# Altium PCB IridiumPhone_r2.PcbDoc
Units mil, origin at the board's own origin, x right, y up, seen from the top; angles counter-clockwise.
Board outline 3661.42 x 1574.8 mil, 6 copper layers (Top Layer, InternalPlane1, MidLayer1, MidLayer2, InternalPlane2, Bottom Layer), stack 70.611 mil thick; 52 components, 55 nets, 243 pads, 153 vias.
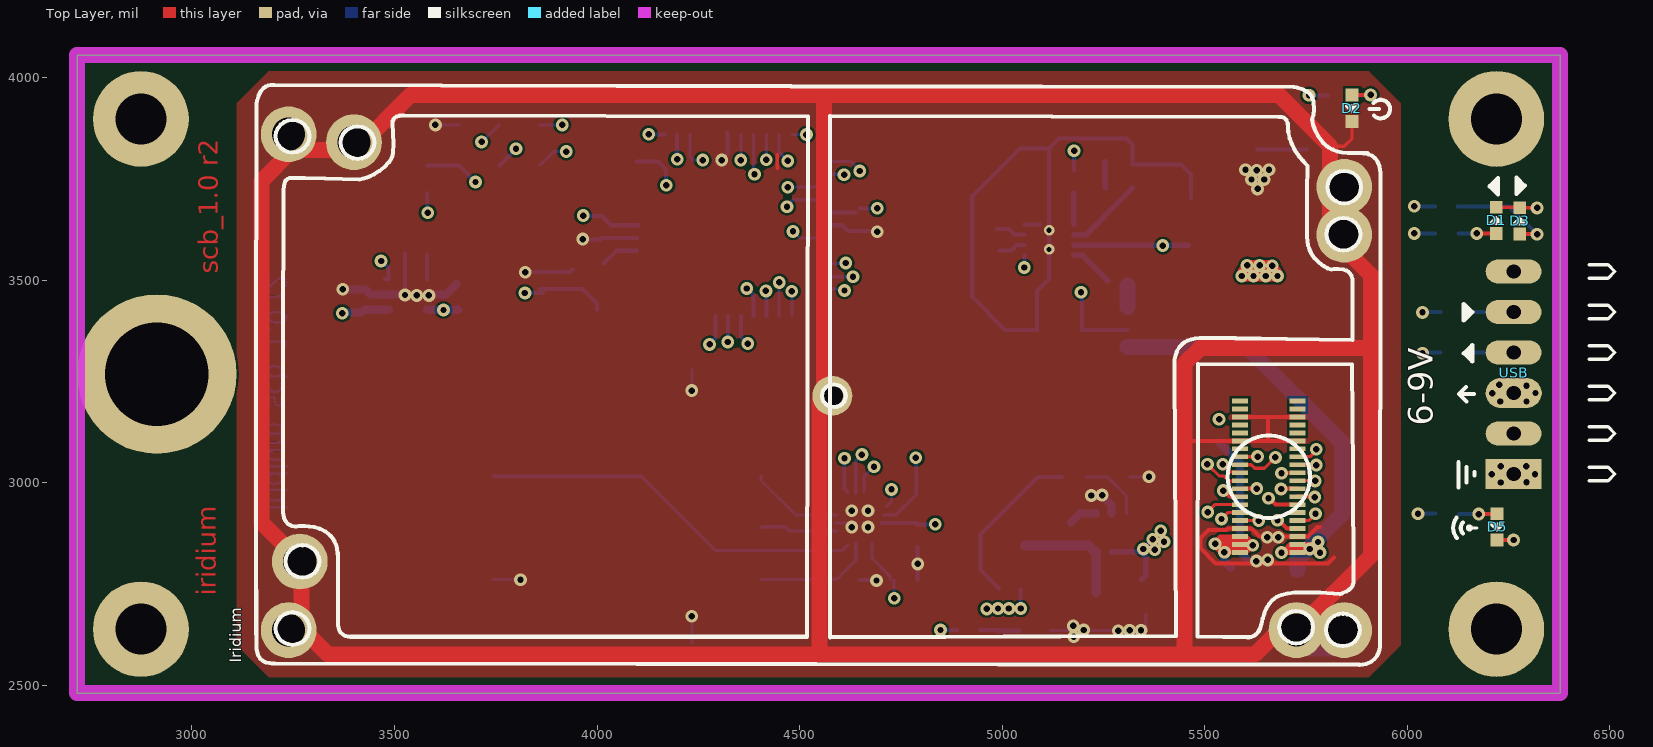
[diagram p0: Top Layer view]
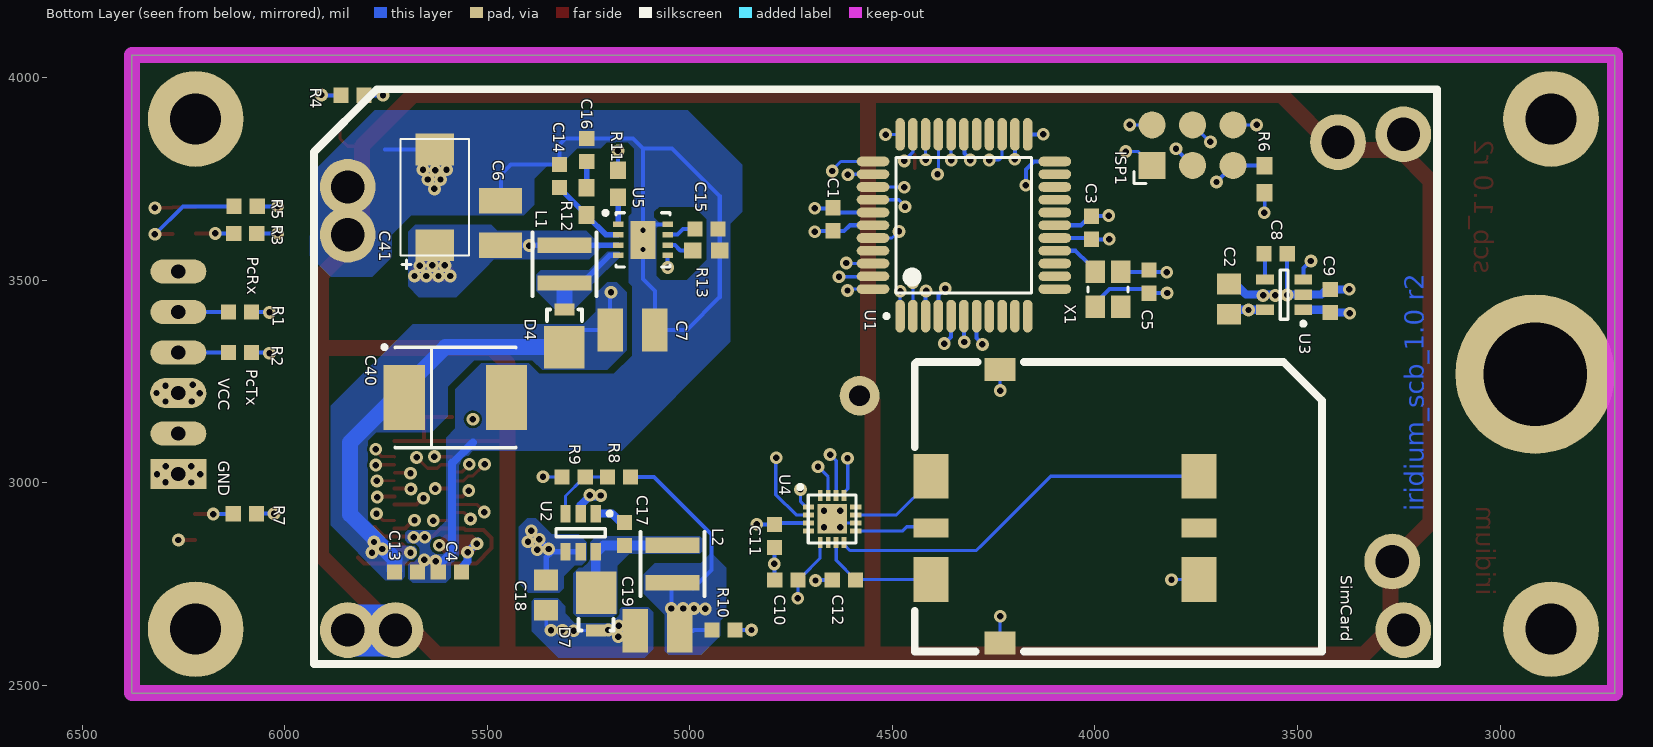
[diagram p1: Bottom Layer view, seen from below]
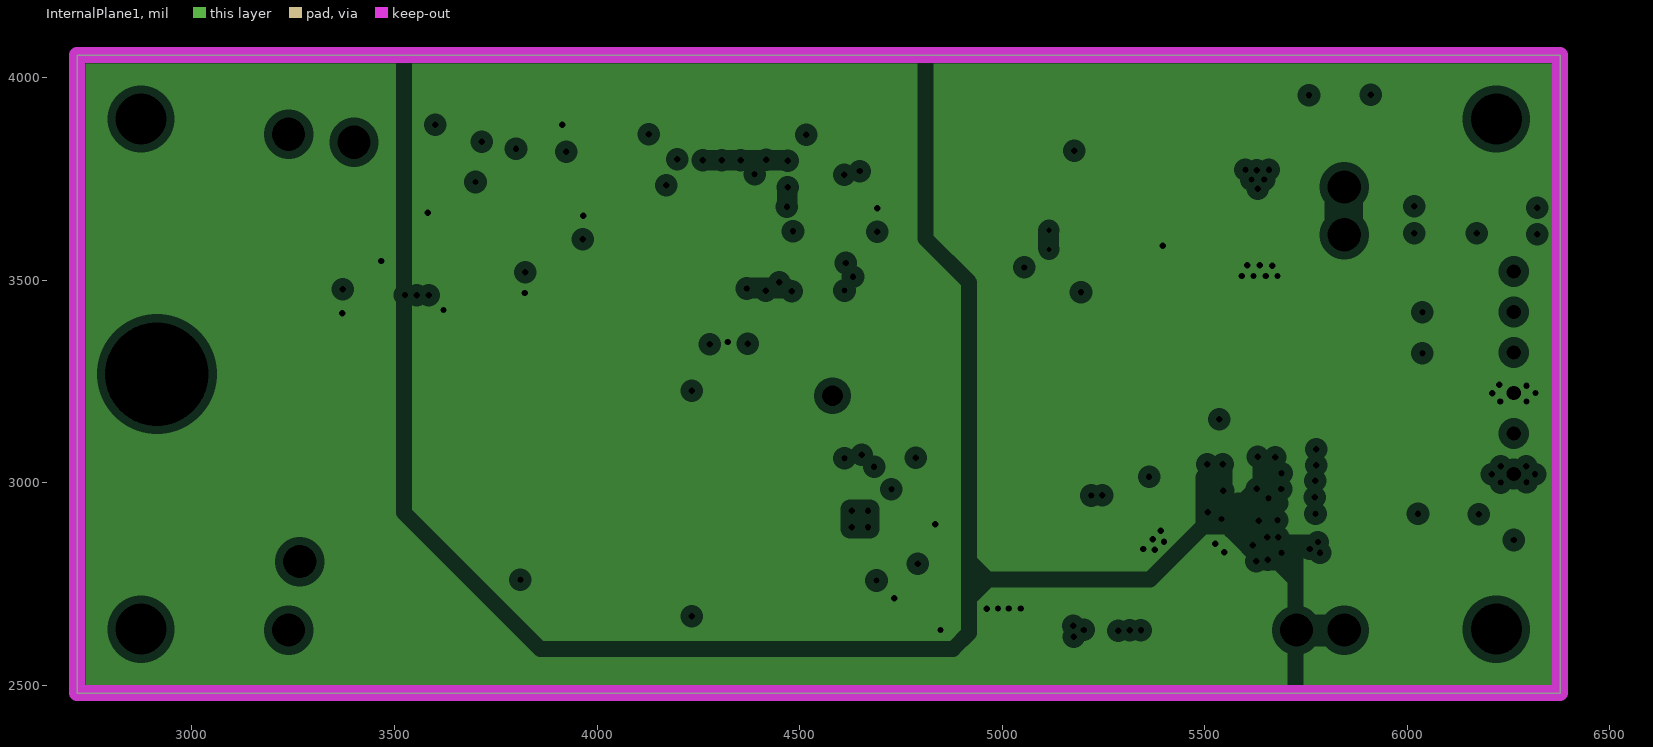
[diagram p2: InternalPlane1, clearances drawn from the general rule]
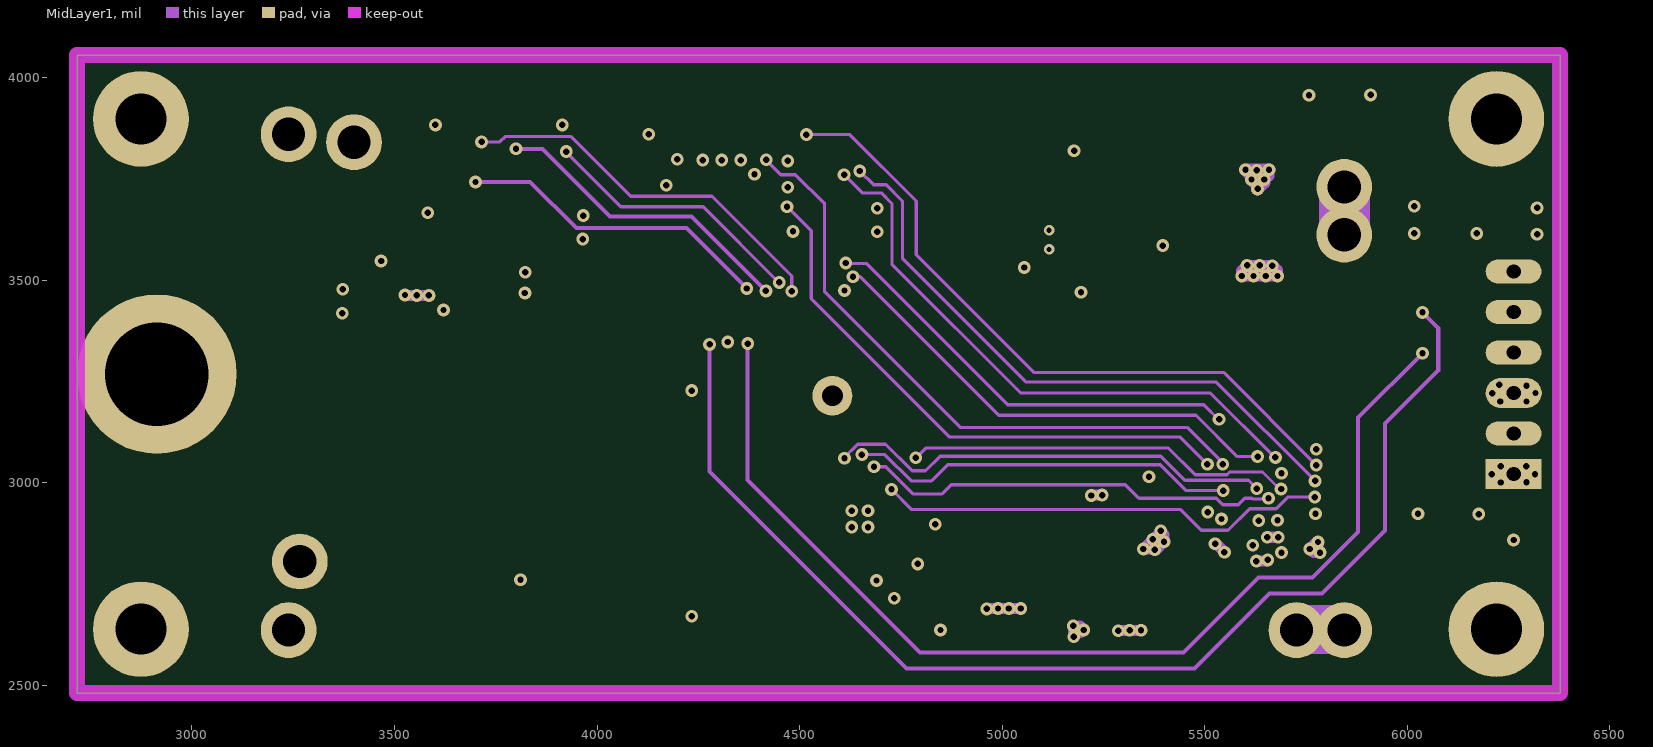
[diagram p3: MidLayer1]
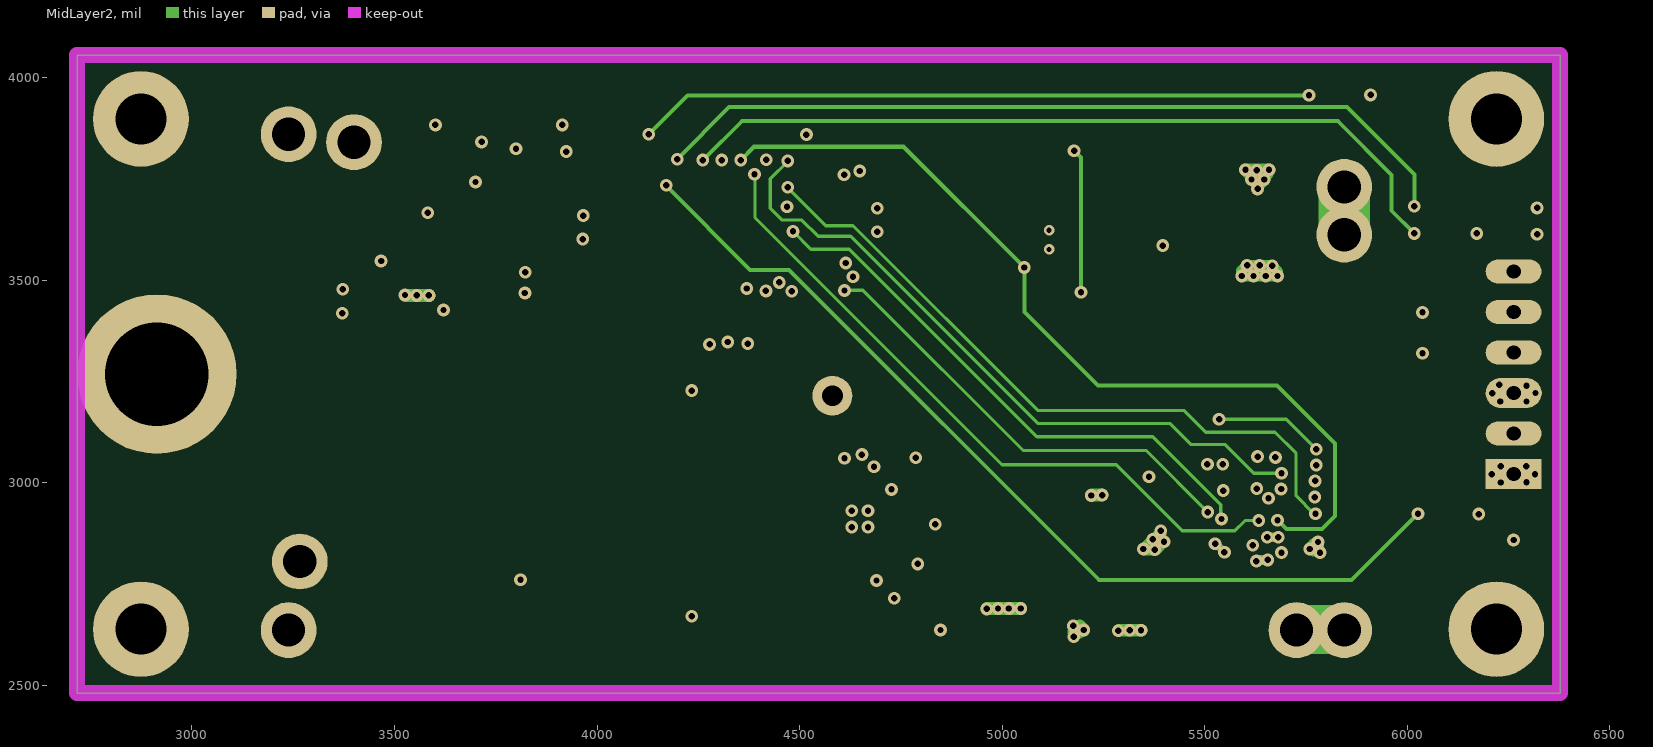
[diagram p4: MidLayer2]
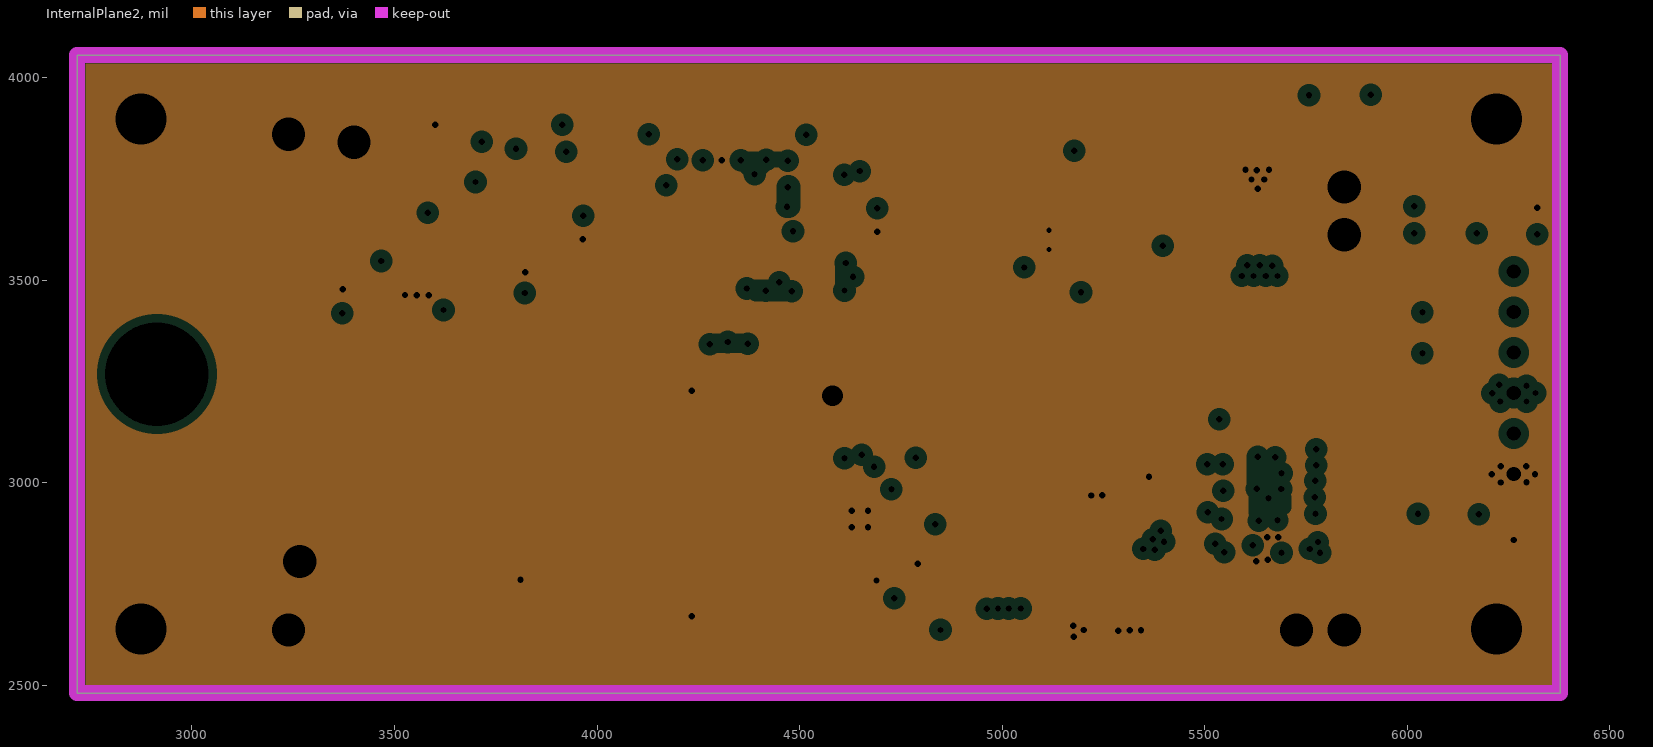
[diagram p5: InternalPlane2, clearances drawn from the general rule]

## Layer stack, top to bottom
Top Layer: signal copper 1.4
Dielectric: core 11.811, FR-4, Dk 4.8
InternalPlane1: plane copper 1.4, net (Multiple Nets)
Dielectric: prepreg 12.6, FR-4, Dk 4.8
MidLayer1: signal copper 1.4
Dielectric: core 12.6, FR-4, Dk 4.8
MidLayer2: signal copper 1.4
Dielectric: prepreg 12.6, FR-4, Dk 4.8
InternalPlane2: plane copper 1.4, net GND
Dielectric: core 12.6, FR-4, Dk 4.8
Bottom Layer: signal copper 1.4

## Board outline
2716.54,2480.32 6377.95,2480.32 6377.95,4055.12 2716.54,4055.12

## Design rules (kind name [scope] priority, off if disabled: settings)
Clearance [All] p1: gap=5.91
HoleSize [All] p1: absolutevalues=TRUE maxlimit=393.7 minlimit=1 maxpercent=80.000 minpercent=20.000
MinimumSolderMaskSliver [All] p1 off: minsoldermaskwidth=10
PlaneClearance [All] p1: clearance=20
PlaneConnect PlaneConnect_1 [IsVia] p1: planeconnectstyle=Direct reliefexpansion=20 reliefentries=4 reliefconductorwidth=10 reliefairgap=10
PlaneConnect [All] p2: planeconnectstyle=Direct reliefexpansion=20 reliefentries=4 reliefconductorwidth=10 reliefairgap=10
PolygonConnect PolygonConnect_2 [(InComponentClass('Bottom Side Components'))   or (InComponentClass('Top Side Components'))] p1: connectstyle=Direct reliefconductorwidth=10 reliefentries=4 polygonreliefangle="90 Angle"
PolygonConnect PolygonConnect_1 [IsVia] p2: connectstyle=Direct reliefconductorwidth=10 reliefentries=4 polygonreliefangle="90 Angle"
PolygonConnect [All] p3: connectstyle=Relief reliefconductorwidth=10 reliefentries=4 polygonreliefangle="90 Angle"
RoutingVias [All] p1: holewidth=28 width=50 viastyle="Through Hole" minholewidth=7.87 minwidth=23.62 maxholewidth=28 maxwidth=78.74
SilkToSilkClearance [All] p1 off: silktosilkclearance=10
SilkscreenOverComponentPads [All] p1 off: minsilkscreentomaskgap=10
SolderMaskExpansion SolderMaskExpansion_1 [IsVia] p1: expansion=-39.37
SolderMaskExpansion [All] p2: expansion=4
TestPointUsage [All] p1: valid=0 allowmultiple=FALSE
Testpoint [All] p1: side=15 testpointundercomponent=TRUE minsize=40 maxsize=100 preferedsize=60 minholesize=0 maxholesize=40 preferedholesize=32 testpointgrid=1 style=1023 order=0-112345678
Width [All] p1: maxlimit=39.37 minlimit=5.91 preferedwidth=10 toplayer_prefwidth=7.87 midlayer1_minwidth=7.87 midlayer1_prefwidth=7.87 midlayer2_minwidth=7.87 midlayer2_prefwidth=7.87 bottomlayer_prefwidth=7.87 minimp=50.000000 maximp=50.000000 favimp=50.000000
18 further rules are at their usual default settings.

## Classes and differential pairs
component class IridiumPhoneCarrier: C1 C2 C3 C4 C5 C8 C9 C13 C17 C18 C19 C41 D1 D2 D3 D5 D7 Iridium ISP1 L2 R1 R2 R3 R4 R5 R6 R7 R8 R9 R10 U1 U2 U3 USB X1
component class Designator: C6 C7 C14 C15 C16 C40 D4 L1 R11 R12 R13 U5

## Components (designator, comment, footprint, x,y, rotation, side; value= is the part's Value field where it differs from the comment)
C1 "100nF" V0603 4647,3650 r90 bottom
C2 "TAJR475K006RNJ" V0805 3669,3453 r90 bottom
C3 "0603" V0603 4009,3629 r90 bottom
C4 "0603" V0603 5593,2779 r180 bottom
C5 "0603" V0603 3867,3496 r270 bottom
C6 "1210" 1210 5468,3641 r270 bottom
C7 "1210" 1210 5142,3377 r0 bottom
C8 "Cap" V0603 3554,3565 r180 bottom
C9 "Cap" V0603 3419,3448 r270 bottom
C10 "100nF" V0603 4762,2759 r180 bottom
C11 "100nF" V0603 4791,2868 r90 bottom
C12 "100nF" V0603 4620,2759 r180 bottom
C13 "0603" V0603 5701,2779 r0 bottom
C14 "47pF" V0603 5322,3757 r270 bottom
C15 "100nF" V0603 4959,3626 r0 bottom
C16 "2.2nF" V0603 5255,3821 r270 bottom
C17 "Cap" V0603 5162,2873 r270 bottom
C18 "Cap" V0805 5355,2722 r90 bottom
C19 "Cap" 1210 5080,2634 r180 bottom
C40 "47uF/35V/0.3R/10%/CaseE" E 5579,3210 r180 bottom
C41 "470uF/6V" T491D 5630,3704 r90 bottom
D1 "D11" KP-1608SURC_R 6220.11,3647 r90 top
D2 "D11" KP-1608SURC_R 5864,3924 r270 top
D3 "D11" KP-1608SURC_R 6278,3646 r90 top
D4 "UPS140" DO-216AA 5310,3427 r90 bottom
D5 "D11" KP-1608SURC_R 6222.11,2890.37 r270 top
D7 "B230A 30 V, 2 A, DO-214AC, 0,5V" DO-216AA 5232,2635 r270 bottom
Iridium "IR9523 - MOLEX  53885-0408  Stacking Board Connector" IRIDIUMPHONE 5845,3730 r270 top locked
ISP1 "" ISP 3859,3783 r180 bottom
L1 "XFL4020-472MEC" XFL4020 5310,3539 r90 bottom
L2 "XFL4020-472MEC" XFL4020 5043,2799 r90 bottom
R1 "R12" V0603RES 6111,3421 r180 bottom
R2 "R12" V0603RES 6111,3321 r180 bottom
R3 "R12" V0603RES 6098,3615 r0 bottom
R4 "R12" V0603RES 5833,3956 r0 bottom
R5 "R12" V0603RES 6097,3682 r0 bottom
R6 "0603" 0603RES 3581,3749 r270 bottom
R7 "R12" V0603RES 6099,2923 r0 bottom
R8 "R12" V0603RES 5175,3014 r0 bottom
R9 "R12" V0603RES 5287,3014 r0 bottom
R10 "" V0603RES 4917,2636 r180 bottom
R11 "0603" 0603RES 5178,3738 r270 bottom
R12 "0603" 0603RES 5255,3694 r90 bottom
R13 "0603" 0603RES 4960,3573 r180 bottom
SimCard "MOLEX  47388-2001  CONNECTOR, SIM CARD, 1.9MM HEIGHT" simcard 4405,2888 r180 bottom
U1 "ATmega162-16AC" 44A_M 4323.72,3635.18 r90 bottom
U2 "ADP2300" SOT-23-OT6_N 5270,2876 r270 bottom
U3 "LP2992AIM5-3.3" MF05A_N 3533,3464 r0 bottom
U4 "NCN4555" QFN16_3MM 4649,2910 r180 bottom
U5 "LT3580" DFN-MF8 5116,3599 r180 bottom
USB "Header 6H" HDR1X6H 6263,3021 r90 top
X1 "Xtal Osc" CRY_2_5x3_2 3968,3477 r90 bottom

## Footprints (in the part's own frame and the unit in brackets; to place one, negate y for a bottom-side part, rotate by r counter-clockwise, add the part's x,y. Pads: shape width x height; smd on the part's side, far side on the other; paste and mask are expansions set on the pad)
44A_M [mm] "Thin QFP, 44-Leads, Body 10x10mm, Pitch 0.8mm, IPC Low Density"
  oval 2.05x0.6 smd: 1(-5.7,4) 2(-5.7,3.2) 3(-5.7,2.4) 4(-5.7,1.6) 5(-5.7,0.8) 6(-5.7,0) 7(-5.7,-0.8) 8(-5.7,-1.6) 9(-5.7,-2.4) 10(-5.7,-3.2) 11(-5.7,-4) 23(5.7,-4) 24(5.7,-3.2) 25(5.7,-2.4) 26(5.7,-1.6) 27(5.7,-0.8) 28(5.7,0) 29(5.7,0.8) 30(5.7,1.6) 31(5.7,2.4) 32(5.7,3.2) 33(5.7,4)
  oval 0.6x2.05 smd: 12(-4,-5.7) 13(-3.2,-5.7) 14(-2.4,-5.7) 15(-1.6,-5.7) 16(-0.8,-5.7) 17(0,-5.7) 18(0.8,-5.7) 19(1.6,-5.7) 20(2.4,-5.7) 21(3.2,-5.7) 22(4,-5.7) 34(4,5.7) 35(3.2,5.7) 36(2.4,5.7) 37(1.6,5.7) 38(0.8,5.7) 39(0,5.7) 40(-0.8,5.7) 41(-1.6,5.7) 42(-2.4,5.7) 43(-3.2,5.7) 44(-4,5.7)
  silkscreen extent -5.82,-4.25 4.25,4.98, body extent -5,-5 5,5, height 1.2
0603RES [mm] "Chip Capacitor; Body 1.6 x 0.8 mm (LxW typ)"
  rect 1.1x1 smd: 1(-0.85,0) 2(0.85,0)
  body extent -1.12,-0.46 1.02,0.46, height 0.4
1210 [mm] "Chip Capacitor; Body 3.2 x 2.5 mm (LxW typ)"
  rect 1.6x2.7 smd: 1(-1.4,0) 2(1.4,0)
  body extent -1.82,-1.24 1.82,1.22, height 1.4
CRY_2_5x3_2 [mm]
  rect 1.4x1.2 smd: 1(-1.1,-0.8) 2(1.1,-0.8) 3(1.1,0.8) 4(-1.1,0.8)
  silkscreen extent -0.15,-1.25 0.15,1.25, body extent -1.6,-1.25 1.6,1.25, height 0.55
DFN-MF8 [mm] "SON, 8-Leads, Body 3x3mm, Pitch 0.65mm, Microchip Recommended"
  rect 0.65x0.35 smd: 1(-1.55,0.975) 2(-1.55,0.325) 3(-1.55,-0.325) 4(-1.55,-0.975) 5(1.55,-0.975) 6(1.55,-0.325) 7(1.55,0.325) 8(1.55,0.975)
  rect 1.55x2.4 smd: 9(0,0)
  silkscreen extent -2.48,-1.7 1.7,1.82, body extent -1.55,-1.55 1.55,1.55, height 1
DO-216AA [mil] "DO-216AA; 2 Leads; Body 2.7 x 1.6 mm, (LxW)"
  rect 30x50 smd: 1(0,0)
  rect 105x100 smd: 2(-92.5,0)
  silkscreen extent -28,-43 0,43, body extent -138,-43 4,43, height 59
E [mm] "Capacitor, SM Tantalum; Body 7.3 x 6.0 mm (LxW typ)"
  rect 2.6x4.1 smd: 1(-3.2,0) 2(3.2,0)
  silkscreen extent -4.58,-3.15 3.8,3.27
HDR1X6H [mm] "Connector; Header; 6 Position; Right Angle"
  rect 1.9x3.5 hole 0.9: 1(0,0)
  oval 1.5x3.5 hole 0.9: 2(2.54,0) 4(7.62,0) 5(10.16,0) 6(12.7,0)
  oval 1.9x3.5 hole 0.9: 3(5.08,0)
  silkscreen extent -0.42,-6.35 13.12,-4.75
IRIDIUMPHONE [mm]
  rect 0.3x1 smd: 1(13.43,-2.93) 2(13.43,-6.53) 3(13.93,-2.93) 4(13.93,-6.53) 5(14.43,-2.93) 6(14.43,-6.53) 7(14.93,-2.93) 8(14.93,-6.53) 9(15.43,-2.93) 10(15.43,-6.53) 11(15.93,-2.93) 12(15.93,-6.53) 13(16.43,-2.93) 14(16.43,-6.53) 15(16.93,-2.93) 16(16.93,-6.53) 17(17.43,-2.93) 18(17.43,-6.53) 19(17.93,-2.93) 20(17.93,-6.53) 21(18.43,-2.93) 22(18.43,-6.53) 23(18.93,-2.93) 24(18.93,-6.53) 25(19.43,-2.93) 26(19.43,-6.53) 27(19.93,-2.93) 28(19.93,-6.53) 29(20.43,-2.93) 30(20.43,-6.53) 31(20.93,-2.93) 32(20.93,-6.53) 33(21.43,-2.93) 34(21.43,-6.53) 35(21.93,-2.93) 36(21.93,-6.53) 37(22.43,-2.93) 38(22.43,-6.53) 39(22.93,-2.93) 40(22.93,-6.53)
  round 3.5 hole 2.08: GND(-3.3,-66.2) GND(-2.8,-62.1) GND(0,0) GND(3,0) GND(23.5,-65.5) GND(27.8,-3) GND(27.8,0) GND(27.8,-66.2)
  round 2.5 hole 1.3: GND(13.1,-32.1)
  silkscreen extent -6.39,-68.25 29.97,2.27, body extent -6.1,-68.33 30,2.26, height 14.6
ISP [mm] "In Circuit Programming Connector"
  rect 1.7x1.7 smd: 1(0,0)
  round 1.7 smd: 2(0,2.54) 3(2.54,0) 4(2.54,2.54) 5(5.08,0) 6(5.08,2.54)
  silkscreen extent -1.14,-1.14 -0.38,-0.38
KP-1608SURC_R [mm]
  rect 0.8x0.8 smd: 1(-0.825,0) 2(0.825,0)
  silkscreen extent -0.15,-0.3 0.15,0.3, body extent -0.81,-0.41 0.79,0.38, height 1
MF05A_N [mm] "SOT23, 5-Leads, Body 2.9x1.6mm, Pitch 0.95mm, Lead Span 2.8mm, IPC Medium Density"
  rect 1.1x0.65 smd: 1(-1.2,0.95) 2(-1.2,0) 3(-1.2,-0.95) 4(1.2,-0.95) 5(1.2,0.95)
  silkscreen extent -1.32,-1.55 0.25,1.95, body extent -0.9,-1.55 0.9,1.55, height 1.19
QFN16_3MM [mm]
  rect 0.7x0.3 smd: 1(-1.48,0.75) 2(-1.48,0.25) 3(-1.48,-0.25) 4(-1.48,-0.75) 9(1.48,-0.75) 10(1.48,-0.25) 11(1.48,0.25) 12(1.48,0.75)
  rect 0.3x0.7 smd: 5(-0.75,-1.48) 6(-0.25,-1.48) 7(0.25,-1.48) 8(0.75,-1.48) 13(0.75,1.48) 14(0.25,1.48) 15(-0.25,1.48) 16(-0.75,1.48)
  rect 1.85x1.85 smd: 17(0,0)
  silkscreen extent -2.12,-1.5 1.5,2.12, body extent -1.5,-1.5 1.5,1.5, height 0.9
simcard [mm]
  rect 2.2x2.8 smd: 1(0,-3.24) 3(0,3.24) 5(16.8,-3.24) 7(16.8,3.24)
  rect 2.2x1.2 smd: 2(0,0) 6(16.8,0)
  rect 1.95x1.45 smd: 4(4.33,-7.22) 4(4.33,9.94)
  silkscreen extent -1.02,-7.75 24.51,10.41, body extent -0.95,-7.75 24.57,10.35, height 2.1
SOT-23-OT6_N [mm] "SOT23, 6-Leads, Body 2.9x1.6mm, Pitch 0.95mm, Lead Span 2.7mm, IPC Medium Density"
  rect 1.1x0.65 smd: 1(-1.2,0.95) 2(-1.2,0) 3(-1.2,-0.95) 4(1.2,-0.95) 5(1.2,0) 6(1.2,0.95)
  silkscreen extent -1.32,-1.55 0.25,1.95, body extent -0.9,-1.55 0.9,1.55, height 1.45
T491D [mm]
  rect 2x2.4 smd: 1(-3,0) 2(3,0)
  silkscreen extent -4.48,-2.15 3.65,2.15, body extent -3.71,-2.21 3.71,2.21, height 3
V0603 [mm] "Chip Capacitor; Body 1.6 x 0.8 mm (LxW typ)"
  rect 0.95x0.95 smd: 1(-0.725,0) 2(0.725,0)
  body extent -0.8,-0.4 0.8,0.4, height 0.7
V0603RES [mm] "Chip Capacitor; Body 1.6 x 0.8 mm (LxW typ)"
  rect 0.95x0.95 smd: 1(-0.725,0) 2(0.725,0)
  body extent -0.8,-0.4 0.8,0.4, height 0.4
V0805 [mm] "Chip Capacitor; Body 2.0 x 1.2 mm (LxW typ)"
  rect 1.3x1.5 smd: 1(-0.95,0) 2(0.95,0)
  body extent -1.3,-0.66 1.32,0.66, height 0.8
XFL4020 [mil]
  rect 38x134 smd: 1(46.5,0) 2(-46.5,0)
  silkscreen extent -79,-79 79,79, body extent -79,-79 79,79, height 79

## Part data
C1 C10 C11 C12 C14 C15 C16: library part CAP
C2: library part "Cap Pol3", "Polarized Capacitor (Surface Mount)"
C3 C4 C5 C6 C7 C13: library part C0603, "Ceramic Chip Capacitor - Standard"
C8 C9 C17 C18 C19: "Capacitor"
C40 C41: library part ELECTRO1
D1 D2 D3 D5: "Diode, LED"
D4 D7: library part "Diode BAT17", "Silicon RF Schottky Diode for Mixer Applications in the VHF/UHF Range"
Iridium: library part IR9523
ISP1: library part "Header 3X2", "AVR ISP Mk II"
L1 L2: library part Inductor, "Inductor"
R1 R2 R3 R4 R5 R7 R8 R9: "Resistor"
R6 R11 R12 R13: library part Res2, "RESISTOR, 0603 10K"
R10: library part R12, "Resistor"
SimCard: library part SIMCARD
U1: "8-Bit AVR Microcontroller with 16K Bytes of In-System Programmable Flash Memory"
U2: library part LM2734, "SOT23-6 DCDC Switcher"
U3: "Micropower 250 mA Low-Noise Ultra Low-Dropout Regulator, 5-pin SOT-23"
U5: "Boost DCDC"
USB: "Header, 6-Pin, Right Angle"
X1: library part "CFPS-39 2.5 x 3mm 16MHz", "Crystal Oscilator"

## Free pads (board coordinates)
  round 236.22 hole 125.98: 0(2874.02,2637.8) 0(2874.02,3897.64) 0(6220.47,2637.8) 0(6220.47,3897.64)
  round 393.7 hole 255.91: 2(2913.39,3267.72)

## Via types
v1: diameter 31.5, hole 15.75, Top Layer to Bottom Layer, 151 vias
v2: diameter 25.98, hole 12.99, Top Layer to Bottom Layer, tented top, 2 vias

## Nets (pads, with @x,y where several pads share a name; then routed paths per layer and width w, separated by ;. In a path a pad name is that pad's centre, name@x,y a point inside that pad or via, vN(x,y) a via of type N, cw(c..) or ccw(c..) an arc to the next point about the centre after c; other vN are vias at no path point)
+3.3V: C1.2 C2.1 C3.2 C5.2 C10.2 C11.2 ISP1.2 R6.2 R10.2 U1.6 U1.17 U1.38 U3.5 U4.3 U4.5 X1.4 | length 1074.3
  Bottom Layer w7.87: v1@3581,3665 R6.2 ; ISP1.2 v1@3907,3883 ; U4.5@4679,2851 4679,2813 4724.46,2767.54 C10.2@4724.46,2759 ; v1@4733.46,2714.54 C10.2
  Bottom Layer w10: v1(3822,3468) 3866.46,3468 C5.2 ; C5.2@3857,3477 3858,3478 3964,3478 3999.5,3442.5 X1.4 X1.4@3999.5,3427.5 ; v1@3965.46,3657.54 4012.46,3657.54 4034.82,3635.18 U1.17@4103,3635.18 ; v1@4323.72,3338.28 U1.6 ; U1.38 C1.2@4638.13,3666.68 ; C1.2@4649,3677.54 4649.54,3677 v1(4692,3677) ; U4.3@4704,2900.2 C11.2@4790.34,2900.2 ; C11.2 v1@4835.54,2896.54 ; v1@4847,2636 R10.2
  Bottom Layer w20: U3.5 C2.1@3658,3426.6
  other v1: 4848,2636 4734,2714 4835,2897 4323,3347 3621,3426 3966,3659 3582,3666 3914,3883
B_FB: R11.2 U5.1 | length 77.1
  Bottom Layer w13.78: U5.1 R11.2@5177.02,3714.51
B_RT: R13.1 U5.6 | length 67
  Bottom Layer w10: R13.1 5024,3573 5037.2,3586.2 U5.6
B_SS: C15.2 U5.7 | length 73.3
  Bottom Layer w10: C15.2 5017,3626 5031.2,3611.8 U5.7
B_SW: D4.1 L1.2 U5.4 | length 162.2
  Bottom Layer w13.78: U5.4 5198.39,3560.61 L1.2@5260.5,3498.5
  Bottom Layer w39.37: D4.1@5310,3433 L1.2@5310,3486
B_VC: C14.2 R12.1 U5.2 | length 188.8
  Bottom Layer w13.78: U5.2 5207.8,3611.8 R12.1@5252.54,3656.54 ; R12.1 C14.2@5322,3727.54
B_VCR: C16.2 R12.2 | length 65
  Bottom Layer w13.78: R12.2 C16.2
BOOST_EN: Iridium.33 U1.29 U5.5 | length 2325.4
  Top Layer w10: v1@5685.5,2899.5 5689.5,2899.5 5703,2886 5729.35,2886 Iridium.33
  MidLayer2 w10: v1(4355,3796) 4388,3829 4757,3829 v1(5055,3531) 5055,3421 5237,3239 5679,3239 5822,3096 5822,2917 5790,2885 5702,2885 v1(5680,2907)
  Bottom Layer w7.87: v1@4355.21,3800.79 U1.29
  Bottom Layer w10: v1@5054.98,3535.98 U5.5
BST2: C17.1 U2.1 | length 71
  Bottom Layer w19.68: C17.1@5170.54,2901.54 5192.24,2923.24 U2.1
CBYP: C8.1 U3.4 | length 61.3
  Bottom Layer w10: U3.4 C8.1@3580.24,3562.7
CTS: Iridium.17 U1.33 | length 1753.7
  Top Layer w7.87: Iridium.17 v1@5774.22,3043.78
  MidLayer1 w7.87: v1(4517,3859) 4624,3859 4788,3695 4788,3562 5078,3272 5547,3272 v1(5776,3043)
  Bottom Layer w7.87: U1.33 v1@4515.41,3859.59
DCD: Iridium.18 U1.35 | length 1599.6
  Top Layer w7.87: Iridium.18 5615.03,3043.78 5623.81,3035 5648,3035 v1(5675,3062)
  MidLayer1 w7.87: v1(4610,3760) 4655,3715 4702,3715 4728,3689 4728,3539 5046,3221 5514,3221 5673,3062 v1(5675,3062)
  Bottom Layer w7.87: U1.35 v1@4603.83,3761.17
DSR: Iridium.19 U1.32 | length 1783.1
  Top Layer w8: v1@5689.09,3024.09 Iridium.19
  MidLayer2 w8: v1@4473,3795 4428,3750 4428,3677 4457,3648 4506,3648 4546,3608 4626,3608 5088,3146 5414,3146 5466,3094 5550,3094 5621,3023 v1(5690,3023)
  Bottom Layer w7.87: U1.32 4449.7,3815.3 v1@4470,3795
  other v1: 4471,3794
DTR: Iridium.22 U1.37 | length 1577.6
  Top Layer w7.87: v1@5512,3040 5536,3016 5547.19,3016 5559.1,3004.1 5587.6,3004.1 Iridium.22
  MidLayer1 w7.87: v1(4469,3681) 4470,3681 4529,3622 4529,3454 4871,3112 5440,3112 v1(5507,3045)
  Bottom Layer w7.87: v1@4468,3682 4484.17,3698.17 4502,3698.17 U1.37
FB2: R8.2 R9.1 U2.3 | length 161.1
  Bottom Layer w7.87: R8.2@5206.54,3014 R9.1@5261.46,3014 ; R9.1@5263,3011 5307.4,2966.6 U2.3
FULL_POWER_EN: Iridium.28 U1.44 | length 1287.7
  Top Layer w7.87: v1@5513,2933 5525.35,2945.35 Iridium.28
  MidLayer2 w7.87: v1@4613.5,3474.5 4656.5,3474.5 5052,3079 5356,3079 v1(5508,2927)
  Bottom Layer w7.87: U1.44@4575.3,3477.7 U1.44 v1@4607.3,3477.7
  other v1: 4611,3474
GND: C1.1 C2.2 C3.1 C4.1 C5.1 C6.1 C7.1 C8.2 C9.1 C10.1 C11.1 C12.1 C13.1 C14.1 C15.1 C16.1 C18.1 C19.1 C40.2 C41.2 D1.2 D2.2 D3.2 D5.2 D7.1 Iridium.5 Iridium.6 Iridium.11 Iridium.12 Iridium.34 Iridium.35 Iridium.GND ISP1.6 pad.0 R9.2 R13.2 SimCard.4 SimCard.5 U1.16 U1.28 U1.39 U2.2 U3.2 U4.10 U4.17 U5.8 U5.9 USB.1 X1.2 | length 16554.8
  Top Layer w7.87: 4445,3775 4445,3810 ; 5810,3830 5845,3830 5864,3849 D2.2 ; D1.2 D3.2@6277,3679.48 ; D3.2 v1@6324.52,3678.48
  Top Layer w10: 5451.17,3102.83 Iridium.12 5657,3102.83 ; Iridium.6 Iridium.5 ; 5657,3158.89 5657,3102.83 ; Iridium.11 5657,3102.83 ; 5784.35,2890 5778.31,2890 5754.92,2866.61 Iridium.35 5635.69,2866.61 5616.01,2886.3 Iridium.34 5557.99,2886.3 5554.21,2882.52 5509.83,2882.52 5490,2862.69 5490,2838 5527.65,2800.35 5805.35,2800.35 5819.5,2814.5 ; D5.2 v1@6266.89,2857.89
  Top Layer w39.37: 4542,3957 5683,3957 5810,3830 5810,3613 5911,3512 5911,2819.62 Iridium.GND@5726.89,2635.51 ; 4549,2583 Iridium.GND@4549,3201 ; Iridium.GND@4558.34,3211 4560,3212.66 4560,3957 3540,3957 3404,3821 3248,3821 3171.77,3744.77 3171.77,2900.23 3270,2802 3270,2641 3335,2576 5450,2576 ; Iridium.GND@5682,2633 5625,2576 5450,2576 ; 5911,3332 5489,3332 5450,3293 5450,2576
  MidLayer1 w23.62: v1(5655,2865) v1(5682,2865)
  MidLayer1 w27.56: v1@3527,3462 v1(3585,3462) ; v1@5194,2630 5188,2630 v1(5177,2619) 5177,2631 5192,2646 v1(5202,2636) ; v1@5221,2969 v1(5247,2969) ; v1(5287,2634) 5288,2635 v1(5343,2635) ; v1(5628,2806) 5653,2806 v1(5656,2809) ; v1(5655,2865) v1(5682,2865)
  MidLayer1 w31.5: v1@5657,3770 5657,3758 v1(5647,3748) 5647,3741 v1(5631,3725) 5631,3733 v1(5616,3748) ; v1(5616,3748) 5635,3748 v1(5659,3772) v1(5601,3772) 5616,3757 v1(5616,3748)
  MidLayer2 w19.68: v1(5628,2806) v1@5653,2806 ; v1@5634,2811 5648,2811 v1@5653,2806 ; v1(5656,2809) v1@5653,2806
  MidLayer2 w23.62: v1@5653,2806 v1(5656,2809) ; v1(5655,2865) v1(5682,2865)
  MidLayer2 w31.5: v1@3527,3462 v1(3585,3462) ; v1@5189,2630 5188,2631 5177,2631 5192,2646 v1(5202,2636) ; v1@5221,2969 v1(5247,2969) ; v1@5288,2635 v1(5343,2635) ; v1@5655,3763 5647,3755 v1(5647,3748) 5631,3732 5631,3742 v1(5601,3772) v1(5659,3772)
  Bottom Layer w7.87: v1(3601,3883) ISP1.6 ; SimCard.5 v1@3818.44,2760.44 ; SimCard.4@4234.53,2603.75 v1@4234.53,2669.47 ; v1@4234.53,3223.53 SimCard.4@4234.53,3279.34 ; U4.10 U4.17@4639.16,2900.16 ; C19.1@5118.4,2635 D7.1 v1@5276,2635 ; v1@5290.4,2631.6 5340.6,2631.6 5355,2646 C18.1@5355,2675 ; R9.2 v1(5363,3014)
  Bottom Layer w10: v1@3525.46,3464.46 C8.2 ; v1@3819,3520 3934,3520 X1.2@3939.54,3525.54 ; v1@3964,3600.46 C3.1 ; C3.1@4012.23,3603.69 U1.16 ; v1@4309,3799 4322.72,3812.72 U1.28@4322.72,3863.59 ; U1.39 4604.67,3635.18 4619.39,3620.46 C1.1@4641.54,3620.46 ; U4.17@4630.2,2897.2 U4.17@4633.2,2894.2 ; C12.1 v1@4693,2759 ; C1.1@4649,3620.46 v1@4690.54,3620.46 ; C10.1@4791,2759.46 C11.1 ; U5.8 U5.9@5094,3637.39 ; 5116,3530 5116,3825 ; U5.9 5116,3502 5086.88,3472.88 C7.1 5007,3377 4926.54,3457.46 R13.2 4926.54,3707.54 5044,3825 5116,3825 ; C6.1@5467,3703.12 5467,3761 5442.46,3785.54 C14.1 5322,3835 5307.46,3849.54 C16.1 5140.54,3849.54 5116,3825 ; C41.2 5752.89,3822.11
  Bottom Layer w19.68: v1@5216,2965 5249,2965 5270,2944 U2.2 ; 5535.54,3099 5584.54,3050 5587,3050 5587,2829 5610,2806 v1(5628,2806)
  Bottom Layer w20: v1@3367.46,3476.54 C9.1 ; C9.1@3428.46,3476.54 3441,3464 U3.2 3627,3464 C2.2@3653.4,3490.4
  other v1: 5315,2635 5176,2646 4234,2670 4690,2758 3811,2760 4792,2799 6263,2858 4629,2890 4669,2890 4629,2930 4669,2930 5220,2968 6231,3000 6295,3001 6209,3020 6316,3020 6231,3040 6294,3040 4234,3227 3555,3462 3526,3463 3372,3477 3823,3519 3965,3601 4692,3619 6321,3678 5629,3771 4308,3796
  other v2: 5116,3575.38 5116,3622.62
L1: D3.1 R5.2 | length 265.5
  Top Layer w9.84: D3.1 v1@6319.48,3613.52
  Bottom Layer w9.84: R5.2 6252,3682 v1(6321,3613)
L2: D1.1 R3.2 | length 93.1
  Top Layer w10: v1@6172.48,3614.52 D1.1
  Bottom Layer w10: R3.2 v1(6172,3615)
L3: D2.1 R4.2 | length 100.8
  Top Layer w10: D2.1 v1@5914.48,3956.48
  Bottom Layer w10: R4.2 v1@5909,3956 ; v1@5909,3956 v1(5910,3957) v1@5909,3956
L4: D5.1 R7.2 | length 100.2
  Top Layer w9.84: v1@6171.15,2922.85 D5.1
  Bottom Layer w9.84: R7.2@6128.54,2922 v1(6177,2922) v1@6176.46,2922.54
LBT_HSB: Iridium.30 U1.40 | length 1498
  Top Layer w7.87: v1@5538,2906 5557.67,2925.67 Iridium.30
  MidLayer2 w7.87: v1@4485.5,3618.5 4528,3576 4623,3576 5086,3113 5372,3113 5540,2945 5540,2912 v1(5542,2910)
  Bottom Layer w7.87: v1@4484.5,3620.5 4501.31,3603.69 U1.40
  other v1: 4484,3620
LED1: R5.1 U1.24 | length 2136.5
  MidLayer2 w10: v1@4197,3797 4197,3798 4326,3927 5852,3927 6018,3761 v1(6018,3682)
  Bottom Layer w10: v1@4197.73,3800.73 U1.24 ; v1@6014,3682 R5.1
  other v1: 4198,3798
LED2: R3.1 U1.25 | length 2119.3
  MidLayer2 w9.84: v1@4259,3797 4263,3797 4358,3892 5829,3892 5962,3759 5962,3671 v1(6018,3615)
  Bottom Layer w7.87: U1.25 4229.23,3804.77 4238,3796 v1@4268,3796
  Bottom Layer w9.84: v1@6012,3615 R3.1
  other v1: 4261,3796
LED3: R4.1 U1.23 | length 1748.9
  MidLayer2 w10: v1@4127,3860 v1(4128,3860) 4224,3956 v1(5758,3956)
  Bottom Layer w10: v1@4131.59,3859.59 U1.23 ; v1@5761,3956 R4.1
LED4: R7.1 U1.22 | length 2495.7
  MidLayer2 w9.84: v1@4170,3733 4378,3525 4474,3525 5240,2759 5863,2759 v1(6027,2923)
  Bottom Layer w9.84: U1.22 4150.34,3792.66 4170,3773 v1@4170,3733 ; v1@6022,2923 R7.1
  other v1: 4171,3734
MISO: ISP1.1 U1.2 | length 830.5
  MidLayer1 w7.87: v1@3923,3817 4059,3681 4262,3681 4445.5,3497.5 v1@4457.5,3497.5
  Bottom Layer w7.87: ISP1.1 3893,3817 v1(3924,3817) ; U1.2 v1@4449.7,3495.3
  other v1: 4450,3494
MOSI: ISP1.4 U1.1 | length 1074.3
  MidLayer1 w7.87: v1(3715,3841) 3760,3841 3773,3854 3936,3854 4083,3707 4284,3707 4481,3510 v1@4481,3473
  Bottom Layer w7.87: v1(3715,3841) 3717,3841 ISP1.4 ; U1.1 v1@4481.2,3472.8
  other v1: 4481,3472
PCRX: R1.1 USB.5 | length 123.5
  Bottom Layer w9.84: R1.1 USB.5
PCTX: R2.1 USB.4 | length 121.5
  Bottom Layer w9.84: R2.1@6141.54,3321 USB.4
RESET: ISP1.5 R6.1 U1.4 | length 995.2
  MidLayer1 w10: v1@3699,3742 3835,3742 3949,3628 4221,3628 4360,3489 v1@4375,3489
  Bottom Layer w10: R6.1@3581.54,3783 ISP1.5 v1(3700,3742) ; v1@4368,3482 4386.71,3463.29 U1.4
  other v1: 4370,3479
RI: Iridium.20 U1.31 | length 1679.7
  Top Layer w7.87: v1@5547,3042 5563.22,3025.78 5586.23,3025.78 Iridium.20
  MidLayer1 w7.87: 5457,3136 v1@5547,3046
  MidLayer1 w8: v1@4418,3796 4454,3760 4490,3760 4562,3688 4562,3471 4897,3136 5457,3136
  Bottom Layer w8: v1@4418.2,3795 U1.31
  other v1: 5545,3045 4418,3797
RTS: Iridium.21 U1.34 | length 1679.1
  Top Layer w6: Iridium.21 v1@5774,3004.41
  MidLayer1 w7.87: v1(4649,3769) 4683,3735 4714,3735 4754,3695 4754,3554 5060,3248 5529,3248 v1(5773,3004)
  Bottom Layer w7.87: U1.34 4627.34,3792.66 v1@4650,3770
RXD0: R2.2 U1.5 | length 2768.1
  MidLayer1 w10: v1(4372,3343) 4372,3006 4798,2580 5448,2580 5633,2765 5766,2765 5879,2878 5879,3160 v1(6038,3319)
  Bottom Layer w10: U1.5 4355.21,3358.79 v1@4370,3344 ; v1@6038,3321 R2.2
RXD1: Iridium.15 U1.42 | length 1482
  Top Layer w7.87: Iridium.15 5730.18,3064 5760.81,3064 5775.81,3079 v1@5785,3079
  MidLayer1 w7.87: v1@4614,3541 4665,3541 5014,3192 5498,3192 v1@5537,3153
  MidLayer2 w7.87: v1@5538,3156 5702,3156 v1(5776,3082)
  Bottom Layer w7.87: U1.42 v1@4616,3540.69
  other v1: 5536,3156 4614,3542
SCK: ISP1.3 U1.3 | length 877.7
  MidLayer1 w9.84: v1(3800,3824) 3865,3824 4032,3657 4233,3657 4413,3477 v1@4416,3477
  Bottom Layer w9.84: ISP1.3 v1(3800,3824) ; U1.3 v1@4418.2,3470.8
  other v1: 4417,3473
SIMCLK: Iridium.24 U4.13 | length 1236.3
  Top Layer w10: Iridium.24 v1@5627.28,2984.72
  MidLayer1 w7.87: v1(4611,3060) 4611,3062.19 4643.4,3094.59 4712.41,3094.59 4778,3029 4811,3029 4847,3065 5392.18,3065 5451.59,3005.59 5608.41,3005.59 v1(5629,2985)
  Bottom Layer w7.87: v1@4610.61,3060.61 4610.61,2984.39 U4.13@4619,2976
SIMCLK18: SimCard.3 U4.11 | length 233.8
  Bottom Layer w7.87: SimCard.3 4405,3005 4490,2920 U4.11@4593,2920
SIMEN: Iridium.25 U4.1 | length 1214
  Top Layer w10: Iridium.25 5769.96,2965.04 5771.04,2965.04 v1@5774,2968
  MidLayer1 w7.87: v1(4727,2983) 4777,2933 5441,2933 5492,2882 5558,2882 5611.41,2935.41 5676.6,2935.41 5705.19,2964 v1(5772,2964)
  Bottom Layer w7.87: U4.1@4715,2941 4726.76,2952.76 v1@4726.76,2983.76
SIMIO: Iridium.27 U4.15 | length 1196.2
  Top Layer w10: v1@5659,2962 5675,2946 5729,2946 Iridium.27
  MidLayer1 w7.87: v1@4687.59,3035.41 v1(4684,3039) 4713,3039 4780,2972 4852,2972 4874.59,2994.59 5304.41,2994.59 5338,2961 5528.81,2961 5544.81,2945 5583,2945 5599,2961 5616.81,2961 5618.4,2959.41 5656.41,2959.41 v1(5658,2961)
  Bottom Layer w7.87: U4.15@4659,2976.8 4659,3014 v1@4685,3040
SIMIO18: SimCard.7 U4.8 | length 957
  Bottom Layer w7.87: SimCard.7 4109.44,3015.56 4280,2845 4292.76,2832.24 4605.24,2832.24 U4.8@4619,2846
SIMMODVCC: Iridium.23 U4.2 | length 1195.3
  Top Layer w10: v1@5687.28,2984.72 Iridium.23
  MidLayer1 w7.87: v1(4787,3061) 4788,3061 4812,3085 5411,3085 5476.63,3019.37 5555.56,3019.37 5562.19,3026 5643,3026 5685,2984 v1(5689,2984)
  Bottom Layer w7.87: U4.2@4707,2920 4738,2920 4788,2970 v1@4788,3062
SIMRST: Iridium.26 U4.14 | length 1110.1
  Top Layer w10: v1@5544,2983 5561.96,2965.04 Iridium.26
  MidLayer1 w7.87: v1(4654,3069) 4710.51,3069 4775.51,3004 4826,3004 4866,3044 5391,3044 5455,2980 v1(5546,2980)
  Bottom Layer w7.87: U4.14@4639,2972.8 4639,3054 v1@4650,3065
SIMRST18: SimCard.2 U4.9 | length 193.8
  Bottom Layer w7.87: SimCard.2 4408,2891 4465,2891 4476,2880 U4.9@4593,2880
SW2: C17.2 D7.2 L2.1 U2.6 | length 280.4
  Bottom Layer w23.62: L2.1@5055.96,2844.46 5213.54,2844.46 U2.6@5229.24,2828.76 ; D7.2@5232.6,2728.1 U2.6
TRX_ON: Iridium.32 U1.30 | length 1826.8
  Top Layer w7.87: Iridium.32 v1(5634,2906)
  MidLayer2 w7.87: v1@4388,3762 4390,3760 4390,3654 5000,3044 5282,3044 5445,2881 5575,2881 5600,2906 v1(5634,2906)
  Bottom Layer w7.87: v1@4386.71,3762.29 U1.30
  other v1: 4389,3761
TX_ACTIVE: Iridium.31 U1.36 | length 1832.4
  Top Layer w7.87: Iridium.31 5756.98,2905.98 v1@5772,2921
  MidLayer1 w7.87: v1(4471,3729) v1@4476,3729
  MidLayer2 w7.87: v1@4470,3729 4565,3634 4632,3634 5088,3178 5449,3178 5503,3124 5674,3124 5726,3072 5726,2967 5770,2923 v1(5774,2923)
  Bottom Layer w7.87: v1@4468.67,3729.67 U1.36
TXD0: R1.2 U1.7 | length 3046.3
  MidLayer1 w10: v1(4278,3341) 4278,3027 4764,2541 5475,2541 5660,2726 5790,2726 5946,2882 5946,3146 6077,3277 6077,3381 v1(6038,3420)
  Bottom Layer w10: v1@4280,3345 4292.22,3357.22 U1.7 ; v1@6040,3421 R1.2
TXD1: Iridium.16 U1.43 | length 1288.9
  Top Layer w7.87: Iridium.16 v1@5625.54,3063.46
  MidLayer1 w7.87: 4650,3508 4992,3166 5479,3166 5581,3064 v1(5631,3064)
  Bottom Layer w7.87: U1.43 4549.32,3508 v1@4634,3508
  other v1: 4632,3508
VBAT: C6.2 C18.2 C41.1 L1.1 U2.4 U2.5 U5.3 USB.3 | length 1250.9
  Top Layer w19.68: v1@5592,3523 v1(5605,3536) ; v1(5667,3535) v1@5680,3522
  MidLayer1 w27.56: v1(5392,2881) 5392,2879 v1(5349,2836) 5375,2836 v1(5377,2834) 5380,2834 v1(5400,2854) 5400,2872 v1@5396,2876 ; v1(5667,3535) 5666,3536 v1(5605,3536) 5592,3523 v1(5592,3510) v1(5680,3510) 5680,3524 v1@5670,3534
  MidLayer2 w23.62: v1(5349,2836) 5349,2838 v1(5392,2881)
  MidLayer2 w27.56: v1(5349,2836) 5351,2834 5380,2834 v1(5400,2854) 5392,2862 v1(5392,2881) ; v1(5667,3535) 5666,3536 v1(5605,3536) 5592,3523 v1(5592,3510) v1(5680,3510) 5680,3521 v1@5668,3533
  Bottom Layer w13.78: U5.3 L1.1@5300.7,3586.2 ; U2.5 5341.24,2828.76 5355,2815 5355,2771 C18.2@5345,2761 ; L1.1 C6.2@5459.62,3585.5 ; v1@5340.76,2828.76 v1@5392,2880
  other v1: 5372,2860 6230,3200 6295,3200 6210,3220 6317,3221 6295,3239 6228,3241 5621,3510 5651,3510 5636,3536 5397,3585
VBOOST: C7.2 C13.2 C40.1 D4.2 Iridium.37 Iridium.39 R11.1 | length 2000.7
  Top Layer w11.81: v1@5692.24,2827.24 Iridium.39 ; v1@5761.5,2835.5 5760,2837 5715,2837 5712,2834 5699,2834 5711.93,2846.93 Iridium.37 ; v1@5771.07,2846.93 Iridium.37 ; v1@5772,2846 5753.24,2827.24 Iridium.39 ; Iridium.39 Iridium.37
  MidLayer1 w27.56: v1@5774,2851 5760,2837 v1(5760,2836) 5769,2827 v1(5785,2827) 5780,2832 v1(5780,2853)
  MidLayer2 w10: v1(5178,3819) 5195,3802 v1(5195,3470)
  MidLayer2 w19.68: v1@5769,2853 5760,2844 v1(5760,2836) 5769,2827 v1(5785,2827) 5785,2848 v1(5780,2853)
  Bottom Layer w10: R11.1@5178,3770.46 v1@5178,3815 ; v1@5197.12,3473.88 C7.2 D4.2@5309.5,3377
  Bottom Layer w39.37: D4.2 5603.5,3334.5 5839,3099 5839,2921 5730,2812 C13.2@5730,2784
  other v1: 5690,2827
VCCSIM: C12.2 SimCard.1 U4.7 | length 297.7
  Bottom Layer w7.87: SimCard.1 4591.44,2760.44 4639,2808 U4.7@4639,2852
VMODEM: C4.2 C9.2 C19.2 Iridium.36 Iridium.38 Iridium.40 L2.2 R8.1 R10.1 U3.1 U3.3 | length 1659.2
  Top Layer w10: v1@5523,2852 5537.61,2866.61 Iridium.36 ; 5542,2843 5545.93,2846.93 5578.07,2846.93 5575,2850 5543,2850 5536,2843 5542,2837 5603,2837 5608,2842 5608,2852 5602,2858 5542,2858 5531,2847 5519,2847 5538,2828 v1(5549,2828) 5549.76,2827.24 5603.39,2827.24 v1@5623.07,2846.93 ; v1@5548.24,2827.24 Iridium.40 Iridium.36 ; Iridium.38 v1@5623.07,2846.93 ; Iridium.36 5603.39,2866.61 v1@5623.07,2846.93
  MidLayer1 w19.68: v1(5526,2849) v1@5528,2849
  MidLayer1 w27.56: v1@4964,2689 v1(5046,2689) ; v1@5528,2849 v1(5549,2828)
  MidLayer2 w19.68: v1(5526,2849) 5528,2849 v1(5549,2828)
  MidLayer2 w31.5: v1@4963,2689 v1(5046,2689)
  Bottom Layer w10: v1@3468,3547 3485.76,3529.24 U3.3 3484.16,3503 U3.3@3477,3503 ; R10.1 4990,2636 ; 4992,2634 C19.2@5042.6,2634 ; L2.2@4992.5,2738.5 4947,2784 4947,2872 5089,3014 R8.1 ; v1(5046,2689) L2.2@5046,2735.5
  Bottom Layer w19.68: v1@5523,2854 v1(5549,2828) 5549,2805 C4.2@5564.46,2789.54
  Bottom Layer w20: v1@3369.54,3419.46 C9.2 3426.14,3426.6 U3.1
  other v1: 4962,2688 4990,2689 5017,2689 5619,2845 3371,3418 3467,3547
X1: U1.15 X1.3 | length 95.9
  Bottom Layer w10: X1.3@4016.5,3540.5 4048.19,3572.19 U1.15
X2: U1.14
pads on no net: Iridium.1 Iridium.2 Iridium.3 Iridium.4 Iridium.7 Iridium.8 Iridium.9 Iridium.10 Iridium.13 Iridium.14 Iridium.29 SimCard.6 U1.8 U1.9 U1.10 U1.11 U1.12 U1.13 U1.18 U1.19 U1.20 U1.21 U1.26 U1.27 U1.41 U4.4 U4.6 U4.12 U4.16 USB.2 USB.6 X1.1

## Polygon pours and split planes (outlines as drawn)
GND on Top Layer "Shield" (solid, pour order 1000): 5905.51,4015.75 5984.25,3937.01 5984.25,2598.43 5905.51,2519.68 3188.98,2519.68 3110.24,2598.43 3110.24,3937.01 3188.98,4015.75
GND on Bottom Layer "Power" (solid, pour order 1007): 5695,2763 5695,2797 5689,2803 5683,2803 5668,2818 5668,2840 5677,2849 5695,2849 5703,2857 5703,2876 5697,2882 5626,2882 5602,2906 5602,3111 5579,3134 5579,3230 5515,3294 5398,3294 5372,3268 5188,3268 5143,3313 5143,3485 5151,3493 5151,3658 5143,3666 5101,3666 5075,3640 5076,3639 5076,3635 5083,3628 5083,3511 5072,3500 5008,3500 4958,3550 4958,3649 4927,3680 4900,3653 4900,3347 5169,3078 5536,3078 5571,3043 5571,2817 5591,2797 5591,2765 5603,2753 5685,2753
B_SW on Bottom Layer "Power" (solid, pour order 1006): 5171,3566 5175,3570 5204,3570 5250,3524 5344,3524 5369,3524 5380,3513 5380,3473 5332,3425 5288,3425 5241,3472 5241,3489 5170,3560
GND on Bottom Layer "Power" (solid, pour order 1005): 5939,3560 5887,3508 5796,3508 5784,3508 5736,3556 5736,3612 5688,3660 5410,3660 5384,3686 5384,3750 5350,3784 5319,3784 5278,3825 5220,3825 5205,3840 5154,3840 5138,3824 5138,3709 5138,3685 5145,3678 5144,3677 5144,3617 5135,3626 5099,3626 5094,3626 5089,3631 5089,3668 5076,3681 4990,3681 4955,3646 4917,3608 4913,3608 4913,3626 4871,3668 4871,3784 5006,3919 5778,3919 5936,3761
SW2 on Bottom Layer "Power" (solid, pour order 1004): 4976,2867 4970,2861 4970,2830 4976,2824 5150,2824 5180,2794 5180,2676 5188,2668 5279,2668 5288,2677 5288,2776 5274,2790 5266,2790 5246,2810 5246,2827 5246,2853 5232,2867
GND on Bottom Layer "Power" (solid, pour order 1003): 5384,2714 5391,2707 5391,2633 5325,2567 5112,2567 5091,2588 5091,2594 5091,2680 5103,2692 5168,2692 5173,2687 5173,2675 5195,2653 5284,2653 5308,2677 5308,2695 5327,2714
VMODEM on Bottom Layer "Power" (solid, pour order 1002): 4948,2826 4973,2801 5059,2801 5087,2801 5114,2774 5114,2725 5062,2673 5062,2584 5053,2575 4972,2575 4925,2622 4925,2659 4911,2673 4911,2790 4948,2827
VBOOST on Bottom Layer "Power" (solid, pour order 1001): 5712,2759 5704,2767 5704,2798 5693,2809 5685,2809 5674,2820 5674,2837 5681,2844 5695,2844 5733,2844 5768,2879 5796,2907 5796,3103 5775,3124 5743,3124 5638,3124 5598,3164 5598,3236 5532,3302 5389,3302 5365,3278 5204,3278 5156,3326 5156,3470 5181,3495 5204,3495 5233,3466 5233,3422 5264,3391 5685,3391 5887,3189 5887,2894 5752,2759
VBAT on Bottom Layer "Power" (solid, pour order 1000): 5678,3637 5696,3619 5696,3484 5670,3458 5597,3458 5577,3458 5506,3529 5484,3551 5316,3551 5249,3551 5217,3583 5256,3622 5476,3622 5491,3637 5677,3637
VBAT on Bottom Layer "DCDC" (solid, pour order 1001): 5255,2808 5267,2796 5285,2796 5312,2769 5312,2748 5312,2739 5323,2728 5399,2728 5423,2752 5423,2891 5402,2912 5381,2912 5341,2872 5274,2872 5255,2853
VBAT on InternalPlane1 (split plane): 168 vertices, not listed, extent 4830.78,2500.41 6357.86,4035.02
+3.3V on InternalPlane1 (split plane): 4791.22,3602 4791.6,3598.14 4792.73,3594.43 4794.55,3591.01 4797.01,3588.01 4899.22,3485.81 4899.22,2637.19 4870.81,2608.78 3868.19,2608.78 3542.78,2934.19 3542.78,4035.02 4791.22,4035.02
VMODEM on InternalPlane1 (split plane): 3503.22,2926 3503.6,2922.14 3504.73,2918.43 3506.55,2915.01 3509.01,2912.01 3846.01,2575.01 3849.01,2572.55 3852.43,2570.73 3856.14,2569.6 3860,2569.22 4879,2569.22 4882.86,2569.6 4886.57,2570.73 4889.99,2572.55 4892.99,2575.01 4932.99,2615.01 4935.45,2618.01 4937.27,2621.43 4938.4,2625.14 4938.78,2629 4938.78,2706.44 4938.99,2706.55 4941.99,2709.01 4973.19,2740.22 5365,2740.22 5368.86,2740.6 5372.57,2741.73 5375.99,2743.55 5378.99,2746.01 5504.19,2871.22 5547.81,2871.22 5551.51,2867.51 5631.01,2788.01 5634.01,2785.55 5637.43,2783.73 5641.14,2782.6 5645,2782.22 5674.81,2782.22 5705.22,2751.81 5705.22,2672.92 5700.9,2671.45 5696.27,2669.17 5691.98,2666.3 5688.1,2662.9 5684.7,2659.02 5681.83,2654.73 5679.55,2650.1 5677.89,2645.21 5676.88,2640.15 5676.55,2635 5676.88,2629.85 5677.89,2624.79 5679.55,2619.9 5681.83,2615.27 5684.7,2610.98 5688.1,2607.1 5691.98,2603.7 5696.27,2600.83 5700.9,2598.55 5705.22,2597.08 5705.22,2500.41 2736.63,2500.41 2736.63,4035.02 3503.22,4035.02
GND on InternalPlane2 (split plane): 6357.86,2500.41 2736.63,2500.41 2736.63,4035.02 6357.86,4035.02
GND on InternalPlane2 (split plane): 5640.22,2988.44 5639.47,2989.05 5640.22,2990.46

## Keep-outs
Keep-Out Layer:
  the board outline again, w39.37

## Other copper
Top Layer:
  rectangle net VBAT: 5597,3496 5673,3549
  text "scb_1.0 r2" at 3064,3516 h47.24 r90
  text "iridium" at 3059,2721 h47.24 r90
MidLayer1:
  rectangle net GND: 5782,3601 5908,3741
  rectangle net GND: 5721,2577 5846,2698
MidLayer2:
  rectangle net GND: 5722,2577 5846,2698
  rectangle net GND: 5781,3595 5909,3735
Bottom Layer:
  rectangle net GND: 5733,2570 5847,2699
  text "iridium_scb_1.0 r2" at 3188,2929 h47.24 r270
InternalPlane1 (plane layer: these items are gaps in the copper):
  lines w39.37: 3523,4046 3523,2926 3860,2589 4879,2589 4919,2629 4919,3494 4811,3602 4811,4047 ; 4920,2804 4962,2762 ; 4922,2760 5152,2760 5365,2760 5514,2909 5538,2909 5565.5,2881.5 5645,2802 5683,2802 5721,2764 ; 4928,2723 4964,2759 ; 5495,2891 5559,2891 ; 5533,2928 5626,2928 5725,2829 5725,2490 ; 5575,2912 5589,2912 5692,2809 ; 5816,3614 5816,3732 ; 5871,3607 5871,3731
  lines w47.24: 4645,2907 4647,2907 4674,2934 4674,2885 4625,2885 4625,2935 4674,2935
  lines w51.18: 4261,3796 4467,3796 ; 4376,3480 4465,3480 ; 4470,3685 4470,3731 ; 5115,3579 5115,3622 ; 5503,2906 5503,3012 ; 5543,3039 5543,2964 5574,2933 ; 5583,2950 5600,2950 5644,2994 5644,3040 ; 5643,2914 5647,2914 5682,2949 ; 5706,2846 5769,2846
  lines w78.74: 5716,2635 5845,2635
InternalPlane2 (plane layer: these items are gaps in the copper):
  lines w39.37: 4371,3482 4471,3482 ; 4393,3466 4487,3466 ; 4418,3791 4392,3765 4384,3765 4351,3798 4473,3798 ; 4607,3483 4607,3537 ; 5623,3000 5623,3060 ; 5628,2973 5628,2926 5681,2926 5695,2940 5695,2963 ; 5643,2954 5683,2954 ; 5660,2976 5660,3056 ; 5686,2970 5694,2970
  lines w47.24: 4275,3344 4367,3344
  lines w59.06: 4473,3682 4473,3730

## Silkscreen, mask and mechanical layers (free items; w line width, h text height)
Top Overlay:
  circle w10: c6154,2888 r3.61
  lines w8: 6154,2888 6172,2888
  lines w10: 5907,3922 5931,3922 ; 5917.43,3936.87 cw(c5935,3922) 5917.89,3906.6 ; 6122.54,2913.07 ccw(c6153.96,2888.32) 6123,2863 ; 6127,2988 6127,3050 ; 6137.8,2901.25 ccw(c6152.54,2887.73) 6138,2874 ; 6140,3319 6161,3340 ; 6140,3400 6161,3421 ; 6140.5,3319.5 6161,3299 6161,3336 6152,3327 6152,3315 6154,3313 6155,3313 ; 6145.64,3235.56 6128.64,3218.56 ; 6146,3427 6147,3427 6149,3425 6149,3413 6140,3404 6140,3441 6160.5,3420.5 ; 6146.64,3200.56 6128.64,3218.56 ; 6147,3000 6147,3038 ; 6165.64,3218.56 6128.64,3218.56 ; 6166,3017 6166,3026 ; 6203,3731 6224,3752 ; 6203.5,3731.5 6224,3711 6224,3748 6215,3739 6215,3727 6217,3725 6218,3725 ; 6270,3712 6291,3733 ; 6276,3739 6277,3739 6279,3737 6279,3725 6270,3716 6270,3753 6290.5,3732.5
  text "6-9V" at 6063,3140 h60 r90
Bottom Overlay:
  text "PcRx" at 6093,3557 h27.56 r90
  text "PcTx" at 6095,3280 h27.56 r90
  text "VCC" at 6165,3258 h27.56 r90
  text "GND" at 6165,3054 h27.56 r90
Top Solder:
  lines w39.37: 3188,3700 3188,3854 ; 3192,2908 3192,2631 3243,2580 3379,2580 ; 3207,2744 3292,2744 ; 3208,2713 3311,2713 ; 3246,3910 3431,3910 ; 3292,2597 3292,2704 ; 3311,3813 3311,3902 ; 3340,3806 3340,3896 ; 3427,3910 3458,3941 3513,3941 ; 4510,2585 4550,2625 ; 4519,3937 4548,3908 ; 4548,2626 4592,2582 ; 4552,3908 4578,3934 ; 4555,3281 4588,3248 ; 4559,3148 4593,3182 ; 5419,2583 5454,2618 ; 5453,2614 5484,2583 ; 5651,2585 5840,2585 ; 5747,3886 5899,3734 5899,3496 ; 5869,3325 5898,3354 ; 5869,3329 5898,3300 ; 5900,2632 5900,2751
Bottom Solder:
  rectangle: 5734,2565 5845,2706
  rectangle: 5772,3617 5918,3734

## Dimensions
2716.54,4055.12 to 6377.95,4055.12 on Mechanical 15
6220.47,2637.8 to 6220.47,3897.64 on Mechanical 15
2874.02,3897.64 to 6220.47,3897.64 on Mechanical 15
6377.95,2480.32 to 6377.95,4055.12 on Mechanical 15